# Allegro board SCHEMA_BLOC.brd
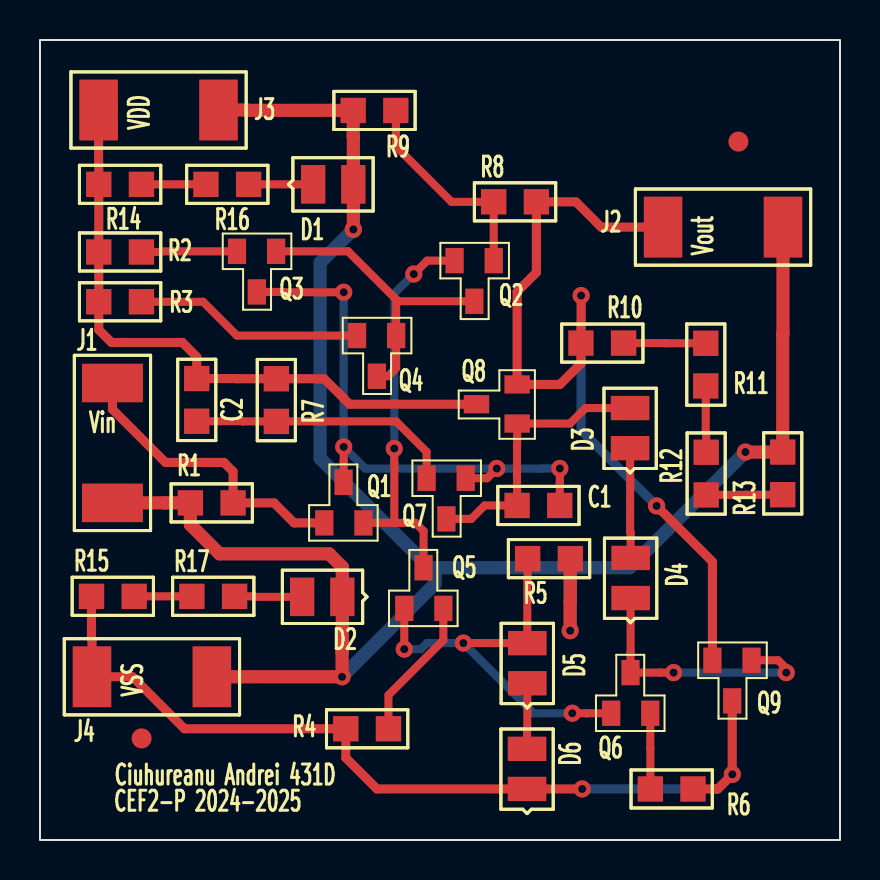
[diagram p0: board, top side]
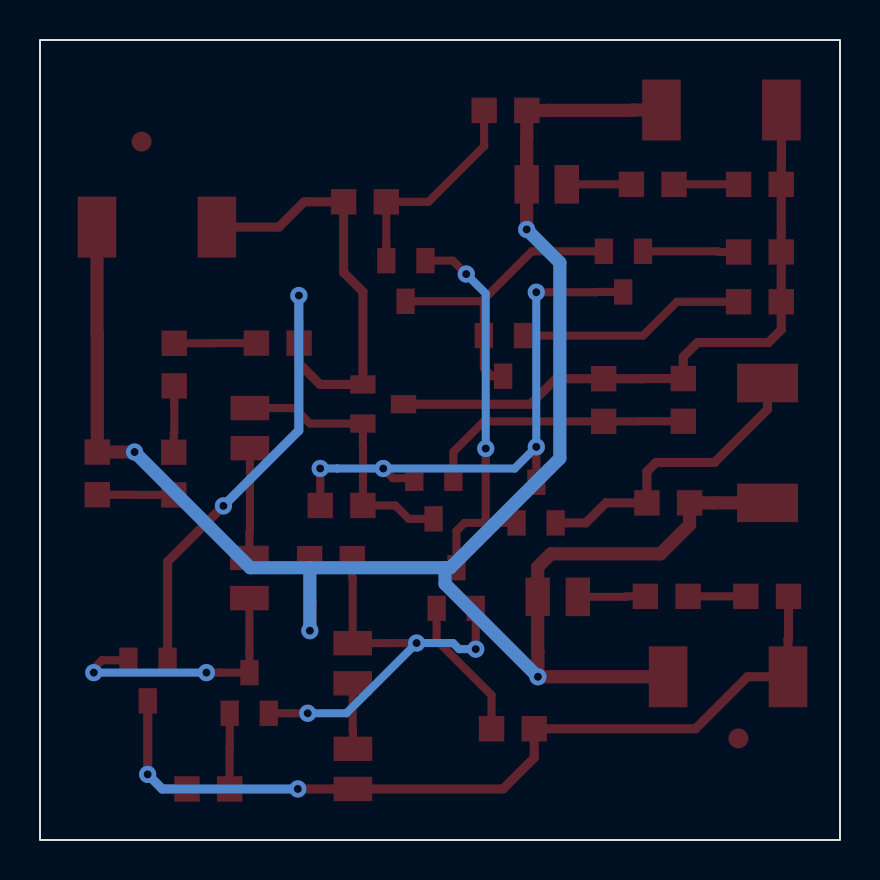
[diagram p1: board, bottom side, seen from below]

Outline 40 x 40 mm; copper layers: TOP, BOTTOM. Coordinates in mm from the lower left corner of the outline.
Outline path: rectangle 0,0 40,40

## Design rules (mm)
nets with their own width: min track width 0.406; nets N00223 N00316 N00500 N00580 N01272 N01385 N01577 N02160 N11121 N14490 N15404 N15428 N16020 N023821 N054491 N55684 N56498 N356941 N546641 N552660 N697080
nets with their own width: min track width 0.457; nets -VSS VDD VIN VOUT
nets with their own width: min track width 0.66; nets GND

## Placement (name value [footprint] x y rotation side)
C1  470p  [SMC0805]  25.99 16.73 180 top
C2  1u  [SMC0805]  7.84 20.94 90 top
D1  5V,LED,LED  [SMD080512]  13.66 32.78 0 top
D2  5V,LED,LED  [SMD080512]  15.12 12.16 180 top
D3  1N4148  [SMD0805]  29.51 19.59 90 top
D4  1N4148  [SMD0805]  29.53 12.1 90 top
D5  1N4148  [SMD0805]  24.37 7.84 90 top
D6  1N4148  [SMD0805]  24.35 2.55 90 top
J1  CON2  [SMR2512]  3.62 22.85 270 top
J2  CON2  [SMR2512]  31.15 30.65 0 top
J3  CON2  [SMR2512]  2.93 36.5 0 top
J4  CON2  [SMR2512]  2.6 8.16 0 top
NOREF  -  []  0 0 0 top
NOREF#2  -  [unnamed#2]  5.08 5.08 0 top
NOREF#3  -  [unnamed#2]  34.92 34.92 0 top
NOREF#4  -  []  40 0 90 top
Q1  QBC846B  [TO236]  14.22 15.98 270 top
Q2  QBC846B  [TO236]  22.69 28.84 90 top
Q3  QBC856B  [TO236]  11.81 29.31 90 top
Q4  QBC856B  [TO236]  17.81 25.09 90 top
Q5  QBC846B  [TO236]  18.21 11.71 270 top
Q6  QBC846B  [TO236]  28.56 6.46 270 top
Q7  QBC856B  [TO236]  21.29 17.96 90 top
Q8  QBC846B  [TO236]  23.73 20.82 0 top
Q9  QBC856B  [TO236]  35.58 8.86 90 top
R1  220k  [SMR0805]  7.52 16.85 0 top
R2  220  [SMR0805]  5.07 29.4 180 top
R3  220  [SMR0805]  5.07 26.91 180 top
R4  470  [SMR0805]  15.29 5.56 0 top
R5  2.2k  [SMR0805]  24.38 14.07 0 top
R6  330  [SMR0805]  32.65 2.55 180 top
R7  330  [SMR0805]  11.82 20.93 90 top
R8  8.2k  [SMR0805]  22.69 31.91 0 top
R9  910  [SMR0805]  15.66 36.48 0 top
R10  22  [SMR0805]  29.18 24.84 180 top
R11  22  [SMR0805]  33.29 22.7 90 top
R12  22  [SMR0805]  33.31 17.26 90 top
R13  22  [SMR0805]  37.14 19.4 270 top
R14  150  [SMR0805]  5.07 32.78 180 top
R15  150  [SMR0805]  2.57 12.18 0 top
R16  82  [SMR0805]  10.43 32.78 180 top
R17  82  [SMR0805]  7.6 12.18 0 top

## Library data of the parts
C1 C2 = C
D1 D2 = LED
D3-D6 = 1N4148_2
J1-J4 = CON2
Q1 Q2 Q5 Q6 Q8 = QBC846B_0
Q3 Q4 Q7 Q9 = QBC856B_0
R1-R17 = R

## Footprints (pads in the part's own frame, mm; a bottom-side part is the same pattern mirrored in y, then rotated)
SMC0805
  rect 1.27x1.27 smd: 1(0,0) 2(2.134,0)
SMD0805
  rect 1.219x1.93 smd: A(2.007,0) C(0,0)
SMD080512
  rect 1.219x1.93 smd: 1(0,0) 2(2.007,0)
SMR0805
  rect 1.27x1.27 smd: 1(0,0) 2(2.134,0)
SMR2512
  rect 1.93x3.048 smd: 1(0,0) 2(5.994,0)
TO236
  rect 1.27x0.914 smd: 1(0.127,0) 2(0.127,1.956) 3(-1.905,0.965)
unnamed#2
  round 1 smd: (0,0)

## Nets
-VSS: D6.C(CAT) J4.1 Q9.3 R4.1 R6.1 R15.1
GND: D1.2 D2.1 J1.2 J2.2 J3.2 J4.2 R1.1 R5.2 R9.1 R13.1
VDD: C2.2 J3.1 Q8.3 R2.2 R3.2 R7.2 R14.2
VIN: J1.1 Q1.1 R1.2
VOUT: J2.1 Q8.2(E) Q9.2(E) R8.2 R10.2
N00223: C1.1 Q1.3 Q3.3 Q7.1
N00316: Q2.3 Q3.1 Q4.1 Q4.3
N00500: Q1.2(E) Q2.2(E) Q5.3
N00580: Q5.2(E) R4.2
N01272: C1.2 D3.A Q7.3 Q8.1
N01385: D5.A Q5.1 Q6.1 R5.1
N01577: Q6.2(E) R6.2
N02160: Q2.1 R8.1 R9.2
N11121: C2.1 Q7.2(E) R7.1
N14490: D4.C(CAT) Q6.3 Q9.1
N15404: Q4.2(E) R3.1
N15428: Q3.2(E) R2.1
N16020: D3.C(CAT) D4.A
N023821: R10.1 R11.2
N054491: R11.1 R12.2
N55684: D1.1 R16.1
N56498: D2.2 R17.2
N356941: R12.1 R13.2
N546641: R14.1 R16.2
N552660: R15.2 R17.1
N697080: D5.C(CAT) D6.A

## Via types
v1: diameter 0.864, hole 0.4, TOP to BOTTOM, 19 vias

## Routing (per net, layer and track width the routed paths; a pad name or vN(x,y) marks a point on that pad's centre or on a via; arc(x,y) is an arc through that point)
-VSS: length 45.5
  TOP w0.457: R6.1 33.82,2.55 33.89,2.55 v1(34.62,3.28) 34.62,3.47 34.61,3.47 Q9.3 ; v1(27.11,2.55) D6.C 16.85,2.55 15.29,4.11 R4.1 7.22,5.56 4.62,8.16 J4.1 2.6,10.04 2.57,10.07 R15.1
  BOTTOM w0.457: v1(27.11,2.55) 33.89,2.55 v1(34.62,3.28)
GND: length 103.5
  TOP w0.66: J4.2 v1(15.1,8.16) 15.1,9.4 15.12,9.41 D2.1 15.12,13.65 14.46,14.31 8.97,14.31 7.52,15.76 R1.1 6.25,16.85 6.25,16.86 J1.2 ; R5.2 26.52,11.89 26.51,11.88 v1(26.51,10.47) ; J2.2 37.15,25.33 37.14,25.32 R13.1 v1(35.27,19.4) ; v1(15.67,30.53) D1.2 15.67,35.17 15.66,35.18 R9.1 14.57,36.48 14.56,36.48 10.36,36.48 10.35,36.5 J3.2
  BOTTOM w0.66: v1(15.67,30.53) 14.01,28.87 14.01,19.08 19.48,13.61 19.75,13.61 ; v1(35.27,19.4) 29.49,13.61 26.51,13.61 ; v1(26.51,10.47) 26.51,13.61 ; 26.51,13.61 19.75,13.61 ; 19.75,13.61 19.75,12.81 v1(15.1,8.16)
VDD: length 32.1
  TOP w0.457: Q8.3 15.48,21.79 14.21,23.06 R7.2 9.85,23.06 9.84,23.07 C2.2 7.84,24.16 7.12,24.87 3.57,24.87 2.94,25.51 R3.2 R2.2 2.94,30.39 R14.2 2.94,33.77 2.93,33.78 J3.1
VIN: length 15.2
  TOP w0.457: J1.1 3.62,21.53 6.27,18.88 9.2,18.88 9.65,18.42 R1.2 11.7,16.85 12.7,15.86 Q1.1
VOUT: length 44.4
  TOP w0.457: Q9.2 33.62,13.91 v1(30.83,16.7) ; J2.1 28.06,30.65 26.79,31.91 R8.2 24.82,28.38 23.86,27.42 Q8.2 26,22.78 27.05,23.83 27.05,25.84 27.06,25.85 v1(27.06,27.22)
  BOTTOM w0.457: v1(27.06,27.22) 27.06,20.48 v1(30.83,16.7)
N00223: length 28.7
  TOP w0.406: Q1.3 15.18,18.91 15.19,18.91 v1(15.19,19.66) ; Q7.1 22.36,18.09 22.84,18.57 v1(22.84,18.57) ; v1(25.99,18.58) 25.99,17.86 25.99,17.86 C1.1 ; Q3.3 12.15,27.4 12.17,27.39 v1(15.19,27.39)
  BOTTOM w0.406: v1(15.19,27.39) v1(15.19,19.66) 16.27,18.57 v1(22.84,18.57) 25.14,18.57 25.14,18.58 v1(25.99,18.58)
N00316: length 15.5
  TOP w0.406: Q3.1 15.4,29.43 17.81,27.03 ; 17.81,27.03 Q4.1 17.81,23.6 17.4,23.19 Q4.3 ; 17.81,27.03 17.9,26.94 Q2.3
N00500: length 20.2
  TOP w0.406: v1(18.69,28.3) 19.36,28.97 Q2.2 ; 17.72,15.86 17.72,18.86 17.71,18.86 v1(17.71,19.57) ; 17.72,15.86 18.77,15.86 19.18,15.45 Q5.3 ; 17.72,15.86 Q1.2
  BOTTOM w0.406: v1(17.71,19.57) 17.71,27.32 v1(18.69,28.3)
N00580: length 7.2
  TOP w0.406: Q5.2 20.17,9.99 17.42,7.25 R4.2
N01272: length 13.9
  TOP w0.406: D3.A 27.28,21.6 26.5,20.82 Q8.1 23.86,19.76 23.85,19.75 23.85,17.7 23.86,17.69 C1.2 22.23,16.73 21.56,16.06 Q7.3
N01385: length 21.4
  TOP w0.406: R5.1 24.38,13.1 24.37,13.09 D5.A 22.65,9.84 22.64,9.85 v1(21.17,9.85) ; Q6.1 27.34,6.34 27.34,6.34 v1(26.61,6.34) ; Q5.1 v1(18.21,9.54)
  BOTTOM w0.406: v1(26.61,6.34) 24.68,6.34 v1(21.17,9.85) 19.35,9.85 19.05,9.54 v1(18.21,9.54)
N01577: length 3.8
  TOP w0.406: R6.2 30.52,4.57 30.52,4.57 Q6.2
N02160: length 10.8
  TOP w0.406: R9.2 17.79,34.69 20.57,31.91 R8.1 22.69,29.93 Q2.1
N11121: length 13.4
  TOP w0.406: C2.1 10.12,20.94 10.13,20.93 R7.1 17.81,20.93 19.33,19.41 Q7.2
N14490: length 13.6
  TOP w0.406: D4.C 29.53,9.34 29.53,9.34 Q6.3 30.97,8.37 30.97,8.37 v1(31.68,8.37) ; Q9.1 36.91,8.99 37.31,8.58 v1(37.31,8.37)
  BOTTOM w0.406: v1(37.31,8.37) v1(31.68,8.37)
N15404: length 11.5
  TOP w0.406: Q4.2 9.84,25.22 8.15,26.91 R3.1
N15428: length 4.8
  TOP w0.406: R2.1 6.04,29.4 6.07,29.43 Q3.2
N16020: length 5.5
  TOP w0.406: D4.A 29.53,15.38 29.51,15.4 D3.C
N023821: length 4.1
  TOP w0.406: R10.1 31.28,24.84 31.29,24.84 R11.2
N054491: length 3.3
  TOP w0.406: R11.1 33.29,21.74 33.28,21.73 33.28,20.38 33.31,20.35 R12.2
N55684: length 3.2
  TOP w0.406: R16.1 D1.1
N56498: length 3.4
  TOP w0.406: D2.2 10.72,12.16 10.69,12.18 R17.2
N356941: length 3.8
  TOP w0.406: R12.1 35.3,17.26 35.31,17.26 R13.2
N546641: length 3.2
  TOP w0.406: R14.1 R16.2
N552660: length 2.9
  TOP w0.406: R15.2 R17.1
N697080: length 3.3
  TOP w0.406: D5.C 24.37,5.51 24.35,5.5 D6.A

## Text on the board
Ref Des/Silkscreen Top: Vin | CEF2-P 2024-2025 | Ciuhureanu Andrei 431D | VSS | VDD | Vout
XSECTION_CHART: *  SURFACE | L1 TOP CONDUCTOR | *  DIELECTRIC | L2 BOTTOM CONDUCTOR | DESIGN CROSS SECTION CHART | ___________________________ | TOTAL THICKNESS 1.6 MM | 1-2
DIMENSION: FIGURE | FINISHED_SIZE | 0.4 | DRILL CHART: TOP to BOTTOM | ALL UNITS ARE IN MILLIMETERS | PLATED | QTY | 19
